# EAGLE board rPiMotors_v1.2 (EAGLE 7.7.0)

Size 100 x 80 mm. Coordinates in mm from the lower left corner, seen from the top.
Outline: 0,0 100,0 100,80 0,80 0,0
Copper layers (1*16): Top 0.035mm / dielectric 1.5mm / Bottom 0.035mm
Design rules "default": minimum track width 10mil, minimum drill 24mil, track to track 8mil, track to pad 8mil, pad to pad 8mil, via to via 8mil, smd to smd 8mil, copper to edge 40mil, drill to drill 8mil, minimum pad ring 10mil, minimum via ring 8mil, stop-mask expansion 4mil, vias tented up to drill 0mil, thermal gap 10mil

## Footprints (pad centres in the part's own frame; a part is rotated, then mirrored left to right if it is on the bottom)
C0603 = smd 1.1 x 1: 1 -0.85,0; 2 0.85,0
PANASONIC_D = smd 3 x 1.4: + 2.4,0; - -2.4,0
1X03 = drill 1.016: 1 -2.54,0; 2 0,0; 3 2.54,0
LED5MMRGB = drill 0.8 pad 1.676: 1 -2.159,0.968; 3 0.889,0.968; 4 2.159,-0.968 | drill 0.8 pad 1.676 octagon: 2 -0.635,-0.968
TSSOP28 = smd 0.305 x 0.991: 1 -4.225,-2.918; 2 -3.575,-2.918; 3 -2.925,-2.918; 4 -2.275,-2.918; 5 -1.625,-2.918; 6 -0.975,-2.918; 7 -0.325,-2.918; 8 0.325,-2.918; 9 0.975,-2.918; 10 1.625,-2.918; 11 2.275,-2.918; 12 2.925,-2.918; 13 3.575,-2.918; 14 4.225,-2.918; 15 4.225,2.918; 16 3.575,2.918; 17 2.925,2.918; 18 2.275,2.918; 19 1.625,2.918; 20 0.975,2.918; 21 0.325,2.918; 22 -0.325,2.918; 23 -0.975,2.918; 24 -1.625,2.918; 25 -2.275,2.918; 26 -2.925,2.918; 27 -3.575,2.918; 28 -4.225,2.918
RPI3 = drill 1.016 square: P$1 8.37,51.23 | drill 1.016: P$2 8.357,53.772; P$3 10.897,51.232; P$4 10.897,53.772; P$5 13.437,51.232; P$6 13.437,53.772; P$7 15.977,51.232; P$8 15.977,53.772; P$9 18.517,51.232; P$10 18.517,53.772; P$11 21.057,51.232; P$12 21.057,53.772; P$13 23.597,51.232; P$14 23.597,53.772; P$15 26.137,51.232; P$16 26.137,53.772; P$17 28.677,51.232; P$18 28.677,53.772; P$19 31.217,51.232; P$20 31.217,53.772; P$21 33.757,51.232; P$22 33.757,53.772; P$23 36.297,51.232; P$24 36.297,53.772; P$25 38.837,51.232; P$26 38.837,53.772; P$27 41.377,51.232; P$28 41.377,53.772; P$29 43.917,51.232; P$30 43.917,53.772; P$31 46.457,51.232; P$32 46.457,53.772; P$33 48.997,51.232; P$34 48.997,53.772; P$35 51.537,51.232; P$36 51.537,53.772; P$37 54.077,51.232; P$38 54.077,53.772; P$39 56.617,51.232; P$40 56.617,53.772 | hole 2.75: 3.5,3.5; 61.5,3.5; 3.5,52.5; 61.5,52.5
R0603 = smd 1 x 1.1: 1 -0.85,0; 2 0.85,0
0603-ARV = smd 0.5 x 0.65: 1 -1.2,-0.625; 2 -0.4,-0.625; 3 0.4,-0.625; 4 1.2,-0.625; 5 1.2,0.625; 6 0.4,0.625; 7 -0.4,0.625; 8 -1.2,0.625
TACTILE-PTH = drill 1.016 pad 1.88: 1 -3.251,2.261; 2 3.251,2.261; 3 -3.251,-2.261; 4 3.251,-2.261
SO08 = smd 0.61 x 2.21: 1 -1.905,-2.616; 2 -0.635,-2.616; 3 0.635,-2.616; 4 1.905,-2.616; 5 1.905,2.616; 6 0.635,2.616; 7 -0.635,2.616; 8 -1.905,2.616
ROCKER = drill 0.8: GND -4.445,6.985; P1 -4.445,0; P2 -4.445,-6.985
BATTERY = drill 1.829: GND@2 27.92,5.09; GND@3 27.92,0.01; P+ -29.588,2.53; P- 34.668,2.55; PWR@2 -22.84,5.07; PWR@3 -22.84,-0.01
2PIN-SCREW-TERMINAL = drill 1.194 long: 1 -2.5,-1.27; 2 2.5,-1.27

## Placement (x,y rotation side)
C1  [C0603]  -63.5,90.17 0 top  (outside the outline)
C2  [C0603]  -67.31,90.17 0 top  (outside the outline)
C3  [PANASONIC_D]  -48.26,82.55 0 top  (outside the outline)
C4  [PANASONIC_D]  -57.15,82.55 0 top  (outside the outline)
JP1  [1X03]  -66.04,81.28 0 top  (outside the outline)
JP2  [1X03]  -74.93,81.28 0 top  (outside the outline)
JP3  [1X03]  -83.82,81.28 0 top  (outside the outline)
JP4  [1X03]  -17.78,90.17 0 top  (outside the outline)
LED1  RGBLED_CA-5MM  [LED5MMRGB]  96.52,3.81 0 top
LF1  [1X03]  -26.67,90.17 0 top  (outside the outline)
LF2  [1X03]  -35.56,90.17 0 top  (outside the outline)
LF3  [1X03]  -44.45,90.17 0 top  (outside the outline)
PCA9685  [TSSOP28]  -38.1,82.55 0 top  (outside the outline)
PCB1  RPI3  [RPI3]  76.2,0 90 top
R1  [R0603]  -55.88,90.17 0 top  (outside the outline)
R2  [R0603]  -59.69,90.17 0 top  (outside the outline)
RN1  [0603-ARV]  -50.8,91.44 0 top  (outside the outline)
RN2  [0603-ARV]  -97.79,-102.87 0 top  (outside the outline)
S1  [TACTILE-PTH]  5.08,3.81 0 top
S2  [TACTILE-PTH]  15.24,3.81 0 top
S3  [TACTILE-PTH]  80.01,3.81 0 top
S4  [TACTILE-PTH]  88.9,3.81 0 top
U$1  NDS8434  [SO08]  -25.4,83.82 0 top  (outside the outline)
U$2  NDS8434  [SO08]  -30.48,83.82 0 top  (outside the outline)
U$3  ROCKER  [ROCKER]  -17.78,69.85 0 top  (outside the outline)
U$4  BATTERY  [BATTERY]  38.1,15.24 0 top
U$5  BATTERY  [BATTERY]  43.18,41.91 180 top
X1  [2PIN-SCREW-TERMINAL]  92.71,73.66 90 top
X2  [2PIN-SCREW-TERMINAL]  92.71,62.23 90 top
X3  [2PIN-SCREW-TERMINAL]  7.62,73.66 270 top
X4  [2PIN-SCREW-TERMINAL]  7.62,62.23 270 top

## Library data of the parts
C1-C4 JP1-JP4 LED1 LF1-LF3 PCA9685 R1 R2 = adafruit
PCB1 = e14_Rpi3_RevA
RN1 RN2 = resistor-dil; OC_FARNELL: unknown; OC_NEWARK: unknown
S1-S4 = SparkFun-Retired
U$1 U$2 = SparkFun-DiscreteSemi
U$3-U$5 = ISCTRainingProgram
X1-X4 = ISCTRainingProgram; MPN: 237-102; OC_FARNELL: unknown; OC_NEWARK: 70K9898

## Nets
3V3: LED1.2 LF1.3 LF2.3 LF3.3 PCA9685.28 PCB1.P$1 RN1.1 RN1.2 RN1.3 RN1.4
5V: JP1.2 JP2.2 JP3.2 JP4.2 PCB1.P$2
9V: C1.1 C2.1 C3.+ C4.+ U$1.7 U$2.7 U$3.P1
9VSW: U$3.P2 U$4.P+
BTN1: PCB1.P$36 RN1.8 S1.2
BTN2: PCB1.P$29 RN1.6 S2.2
BTN3: PCB1.P$31 RN1.5 S3.1
BTN4: PCB1.P$37 RN1.7 S4.1
GND: C1.2 C2.2 C3.- C4.- JP1.1 JP2.1 JP3.1 JP4.1 LF1.1 LF2.1 LF3.1 PCA9685.1 PCA9685.2 PCA9685.3 PCA9685.4 PCA9685.5 PCA9685.14 PCA9685.23 PCA9685.24 PCA9685.25 PCB1.P$9 R1.2 R2.2 S1.3 S2.3 S3.3 S4.4 U$1.1 U$1.6 U$2.1 U$2.6 U$3.GND U$5.P-
ILIM1: R2.1 U$1.4
ILIM2: R1.1 U$2.4
LF1: LF1.2 PCB1.P$8
LF2: LF2.2 PCB1.P$10
LF3: LF3.2 PCB1.P$12
M1O1: U$1.5 X1.2 X2.2
M1O2: U$1.8 X1.1 X2.1
M1S1: PCA9685.15 U$1.2
M1S2: PCA9685.16 U$1.3
M2O2: U$2.5 U$2.8 X3.1 X3.2 X4.1 X4.2
M2S1: PCA9685.17 U$2.2
M2S2: PCA9685.18 U$2.3
N$1: LED1.4 RN2.6
N$2: LED1.3 RN2.7
N$3: LED1.1 RN2.8
N$4: PCB1.P$7
N$6: PCB1.P$11
N$7: PCB1.P$13
N$8: PCB1.P$15
N$9: PCB1.P$17
N$10: PCB1.P$19
N$11: PCB1.P$21
N$12: PCB1.P$23
N$13: PCB1.P$25
N$22: U$4.P- U$5.P+
PWM0: JP1.3 PCB1.P$32
PWM1: JP2.3 PCB1.P$33
PWM2: JP4.3 PCA9685.8
PWM3: JP3.3 PCA9685.9
PWM13: PCA9685.20 RN2.1
PWM14: PCA9685.21 RN2.2
PWM15: PCA9685.22 RN2.3
SCL: PCA9685.26 PCB1.P$5
SDA: PCA9685.27 PCB1.P$3

## Tracks (layer width: path | path; a pad name or v marks a point on that pad's centre or on a via)
3V3  (9 unrouted)
5V  (4 unrouted)
9V  (6 unrouted)
9VSW  (1 unrouted)
BTN1  (2 unrouted)
BTN2  (2 unrouted)
BTN3  (2 unrouted)
BTN4  (2 unrouted)
GND  (32 unrouted)
ILIM1  (1 unrouted)
ILIM2  (1 unrouted)
LF1  (1 unrouted)
LF2  (1 unrouted)
LF3  (1 unrouted)
M1O1  (2 unrouted)
M1O2  (2 unrouted)
M1S1  (1 unrouted)
M1S2  (1 unrouted)
M2O2  (5 unrouted)
M2S1  (1 unrouted)
M2S2  (1 unrouted)
N$1  (1 unrouted)
N$2  (1 unrouted)
N$3  (1 unrouted)
N$22  (1 unrouted)
PWM0  (1 unrouted)
PWM1  (1 unrouted)
PWM2  (1 unrouted)
PWM3  (1 unrouted)
PWM13  (1 unrouted)
PWM14  (1 unrouted)
PWM15  (1 unrouted)
SCL  (1 unrouted)
SDA  (1 unrouted)